# Altium PCB ART-Pi_STM32H750_COPY.PcbDoc (part 1 of 2)
Units mil, origin at the board's own origin, x right, y up, seen from the top; angles counter-clockwise.
Board outline 3346.46 x 2204.72 mil, 4 copper layers (Top Layer, VCC, GND, Bottom Layer), stack 30.634 mil thick; 187 components, 307 nets, 1023 pads, 107 vias.
Unrouted connection lines stored in the file: 478.
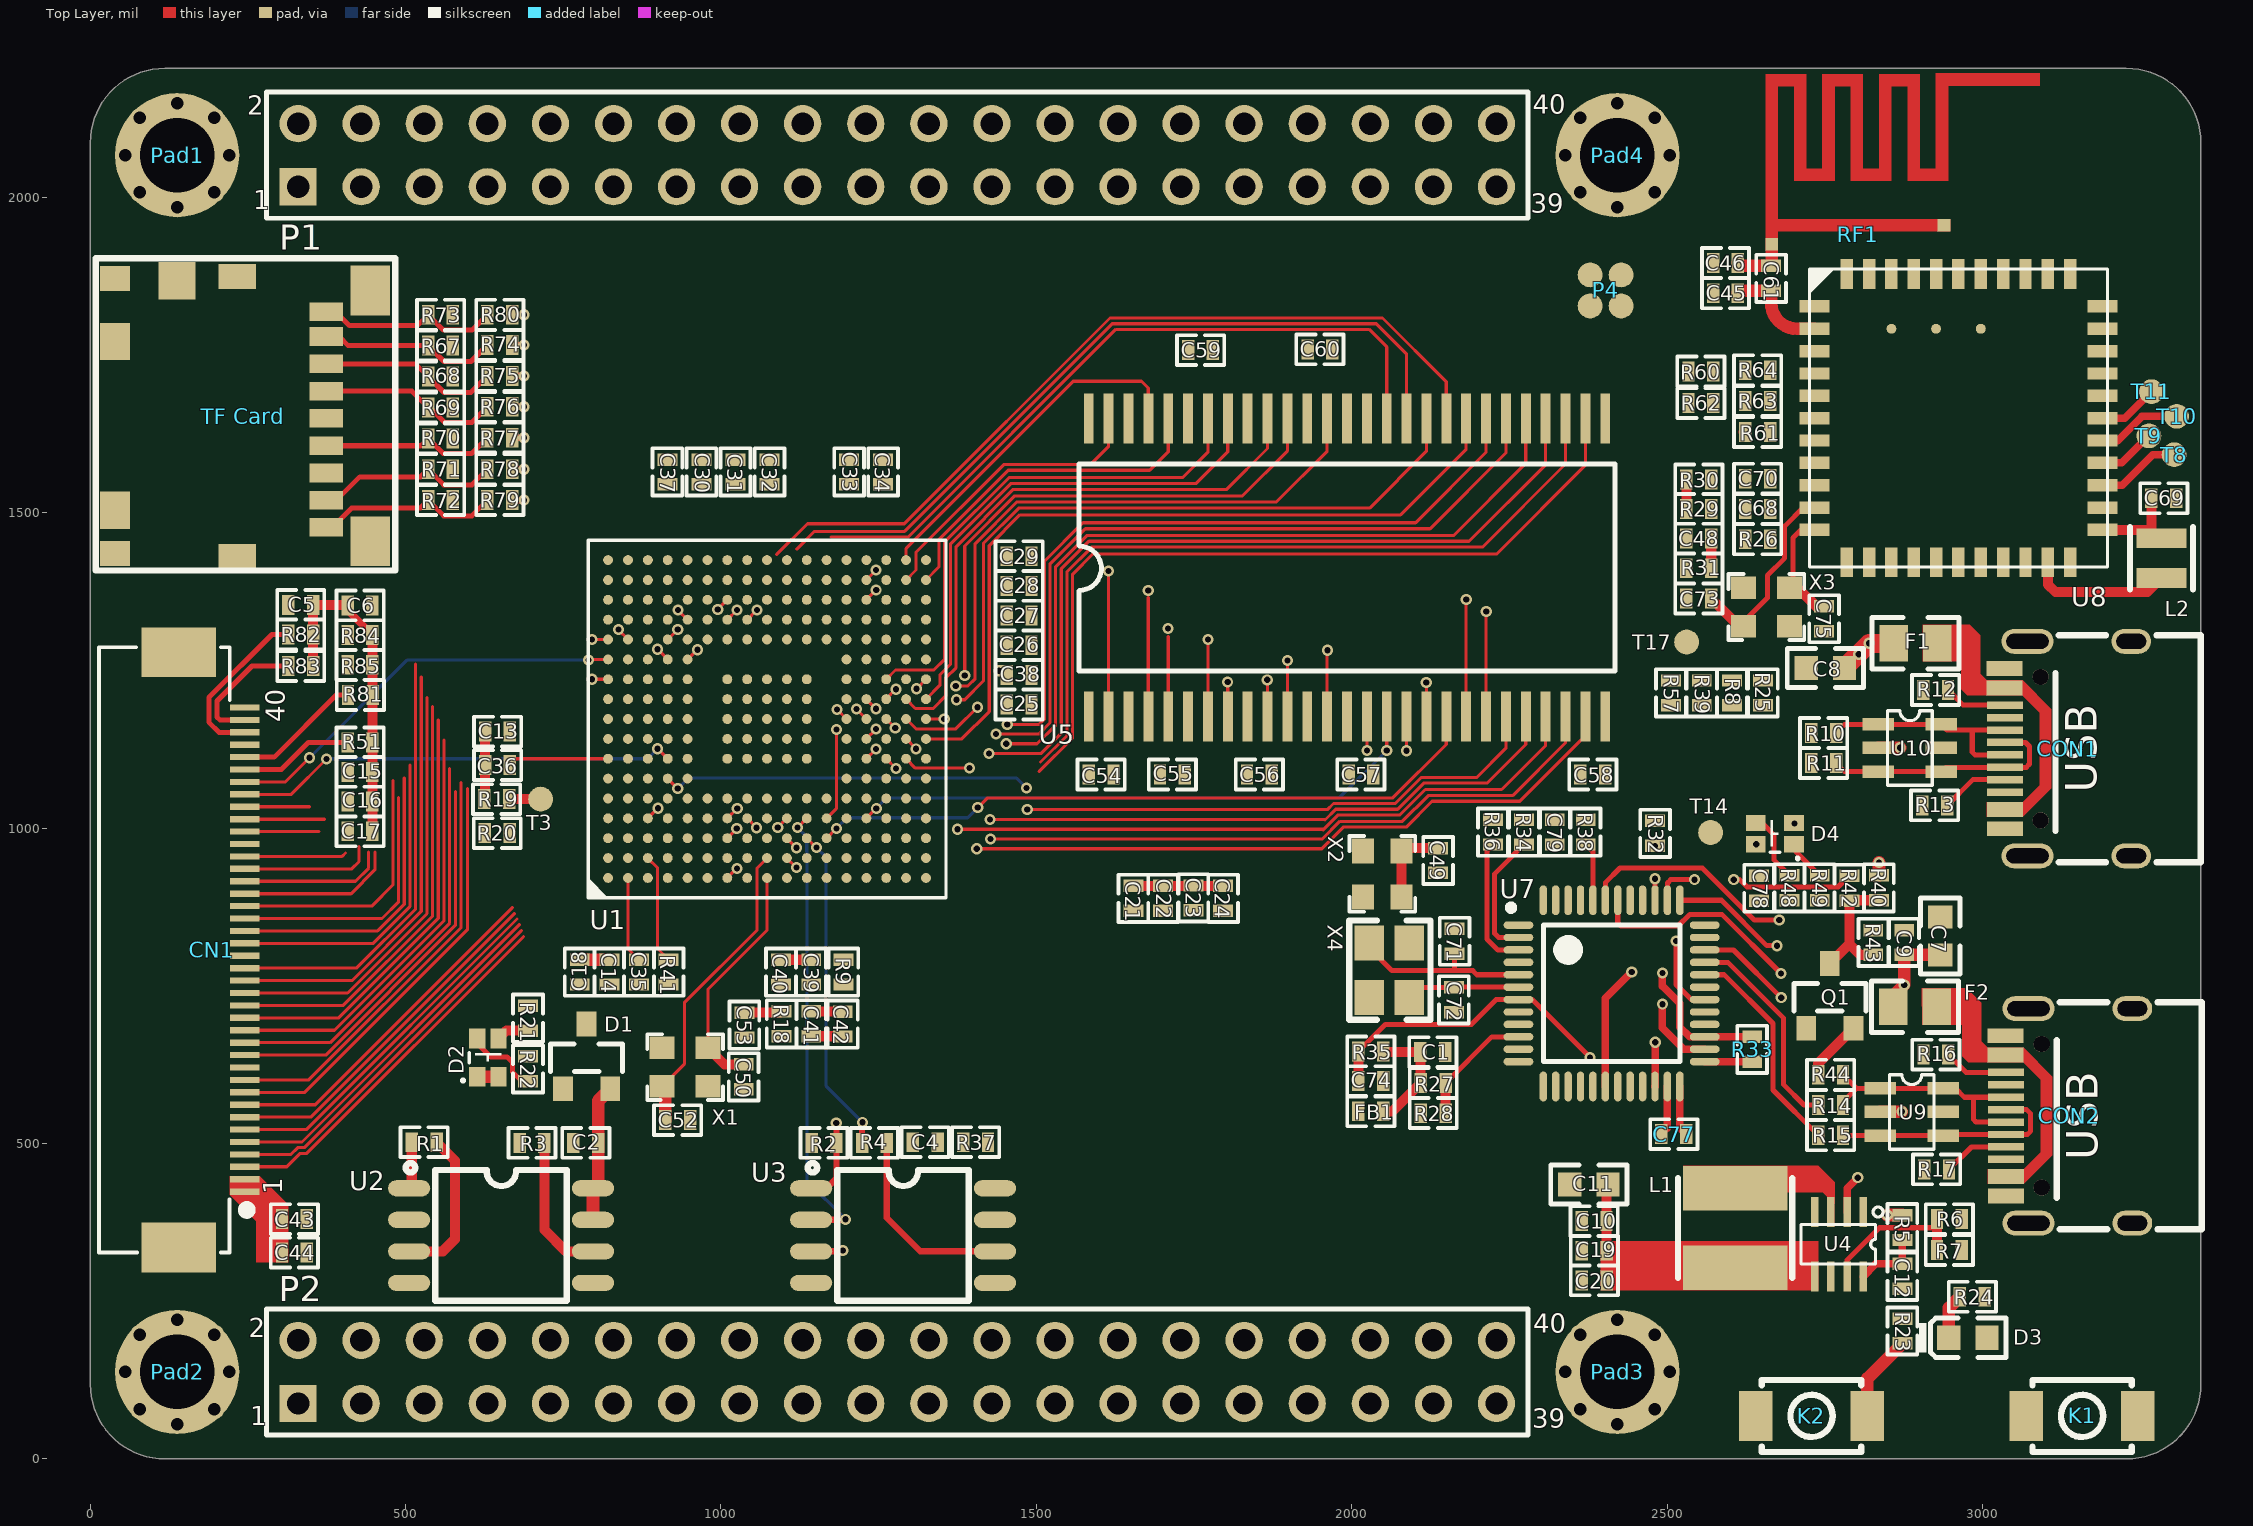
[diagram p0: Top Layer view]
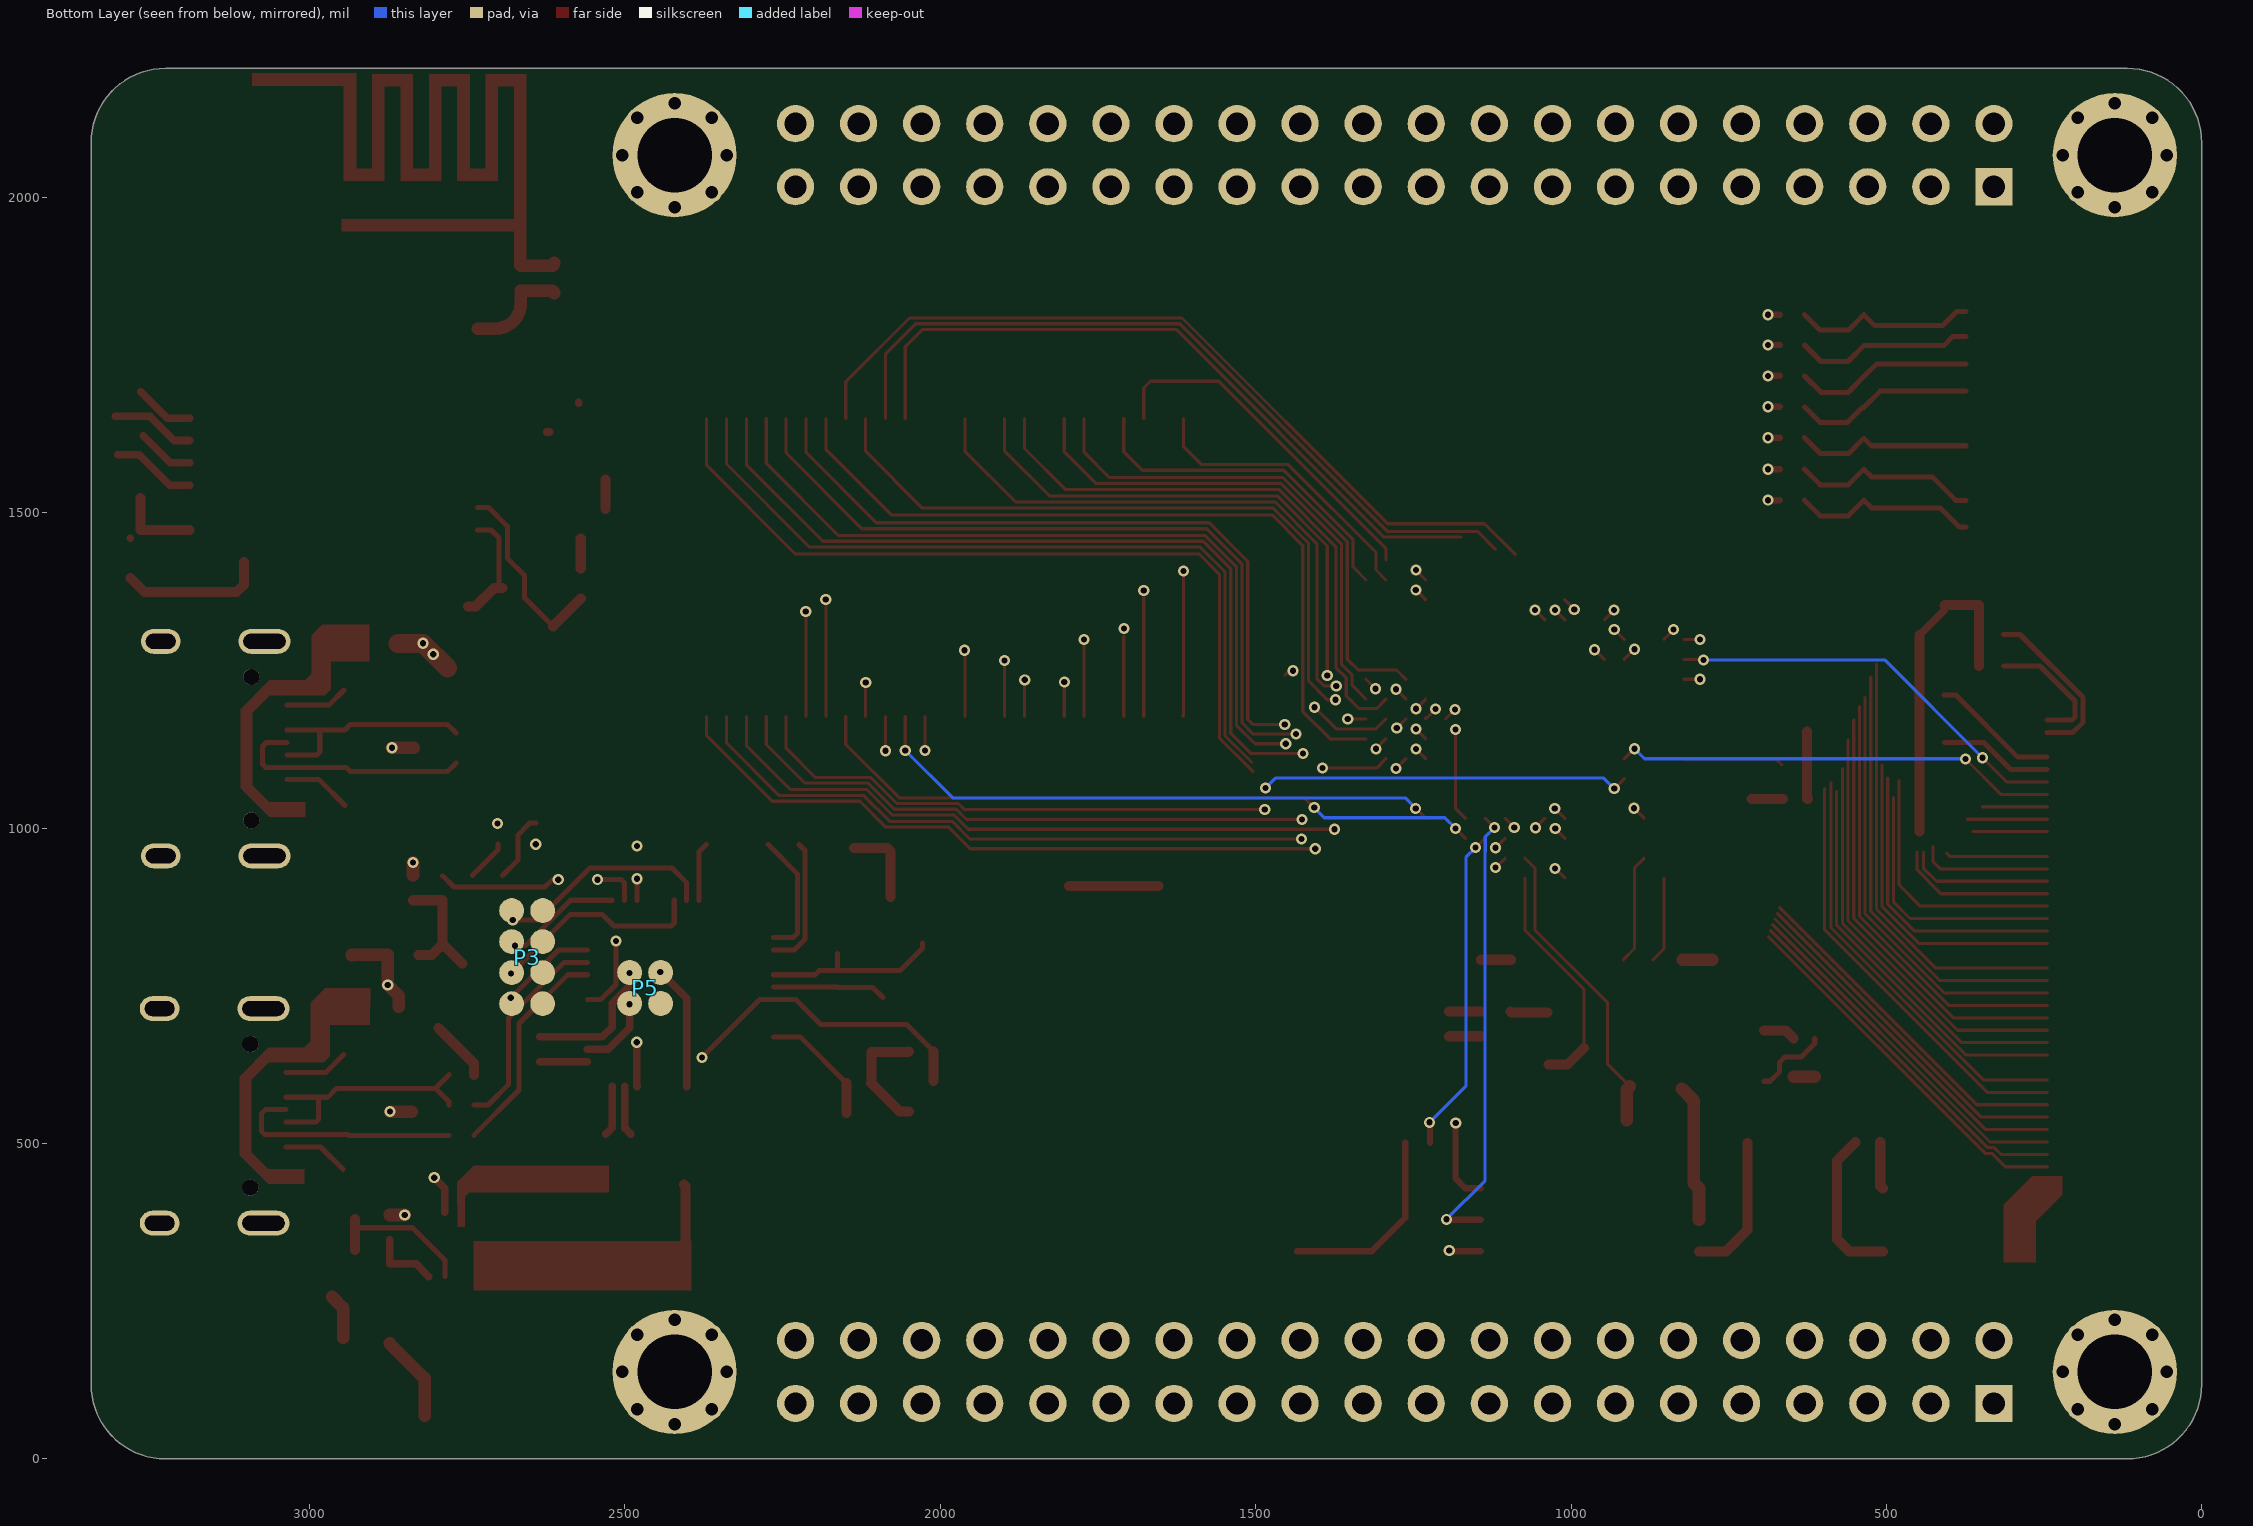
[diagram p1: Bottom Layer view, seen from below]
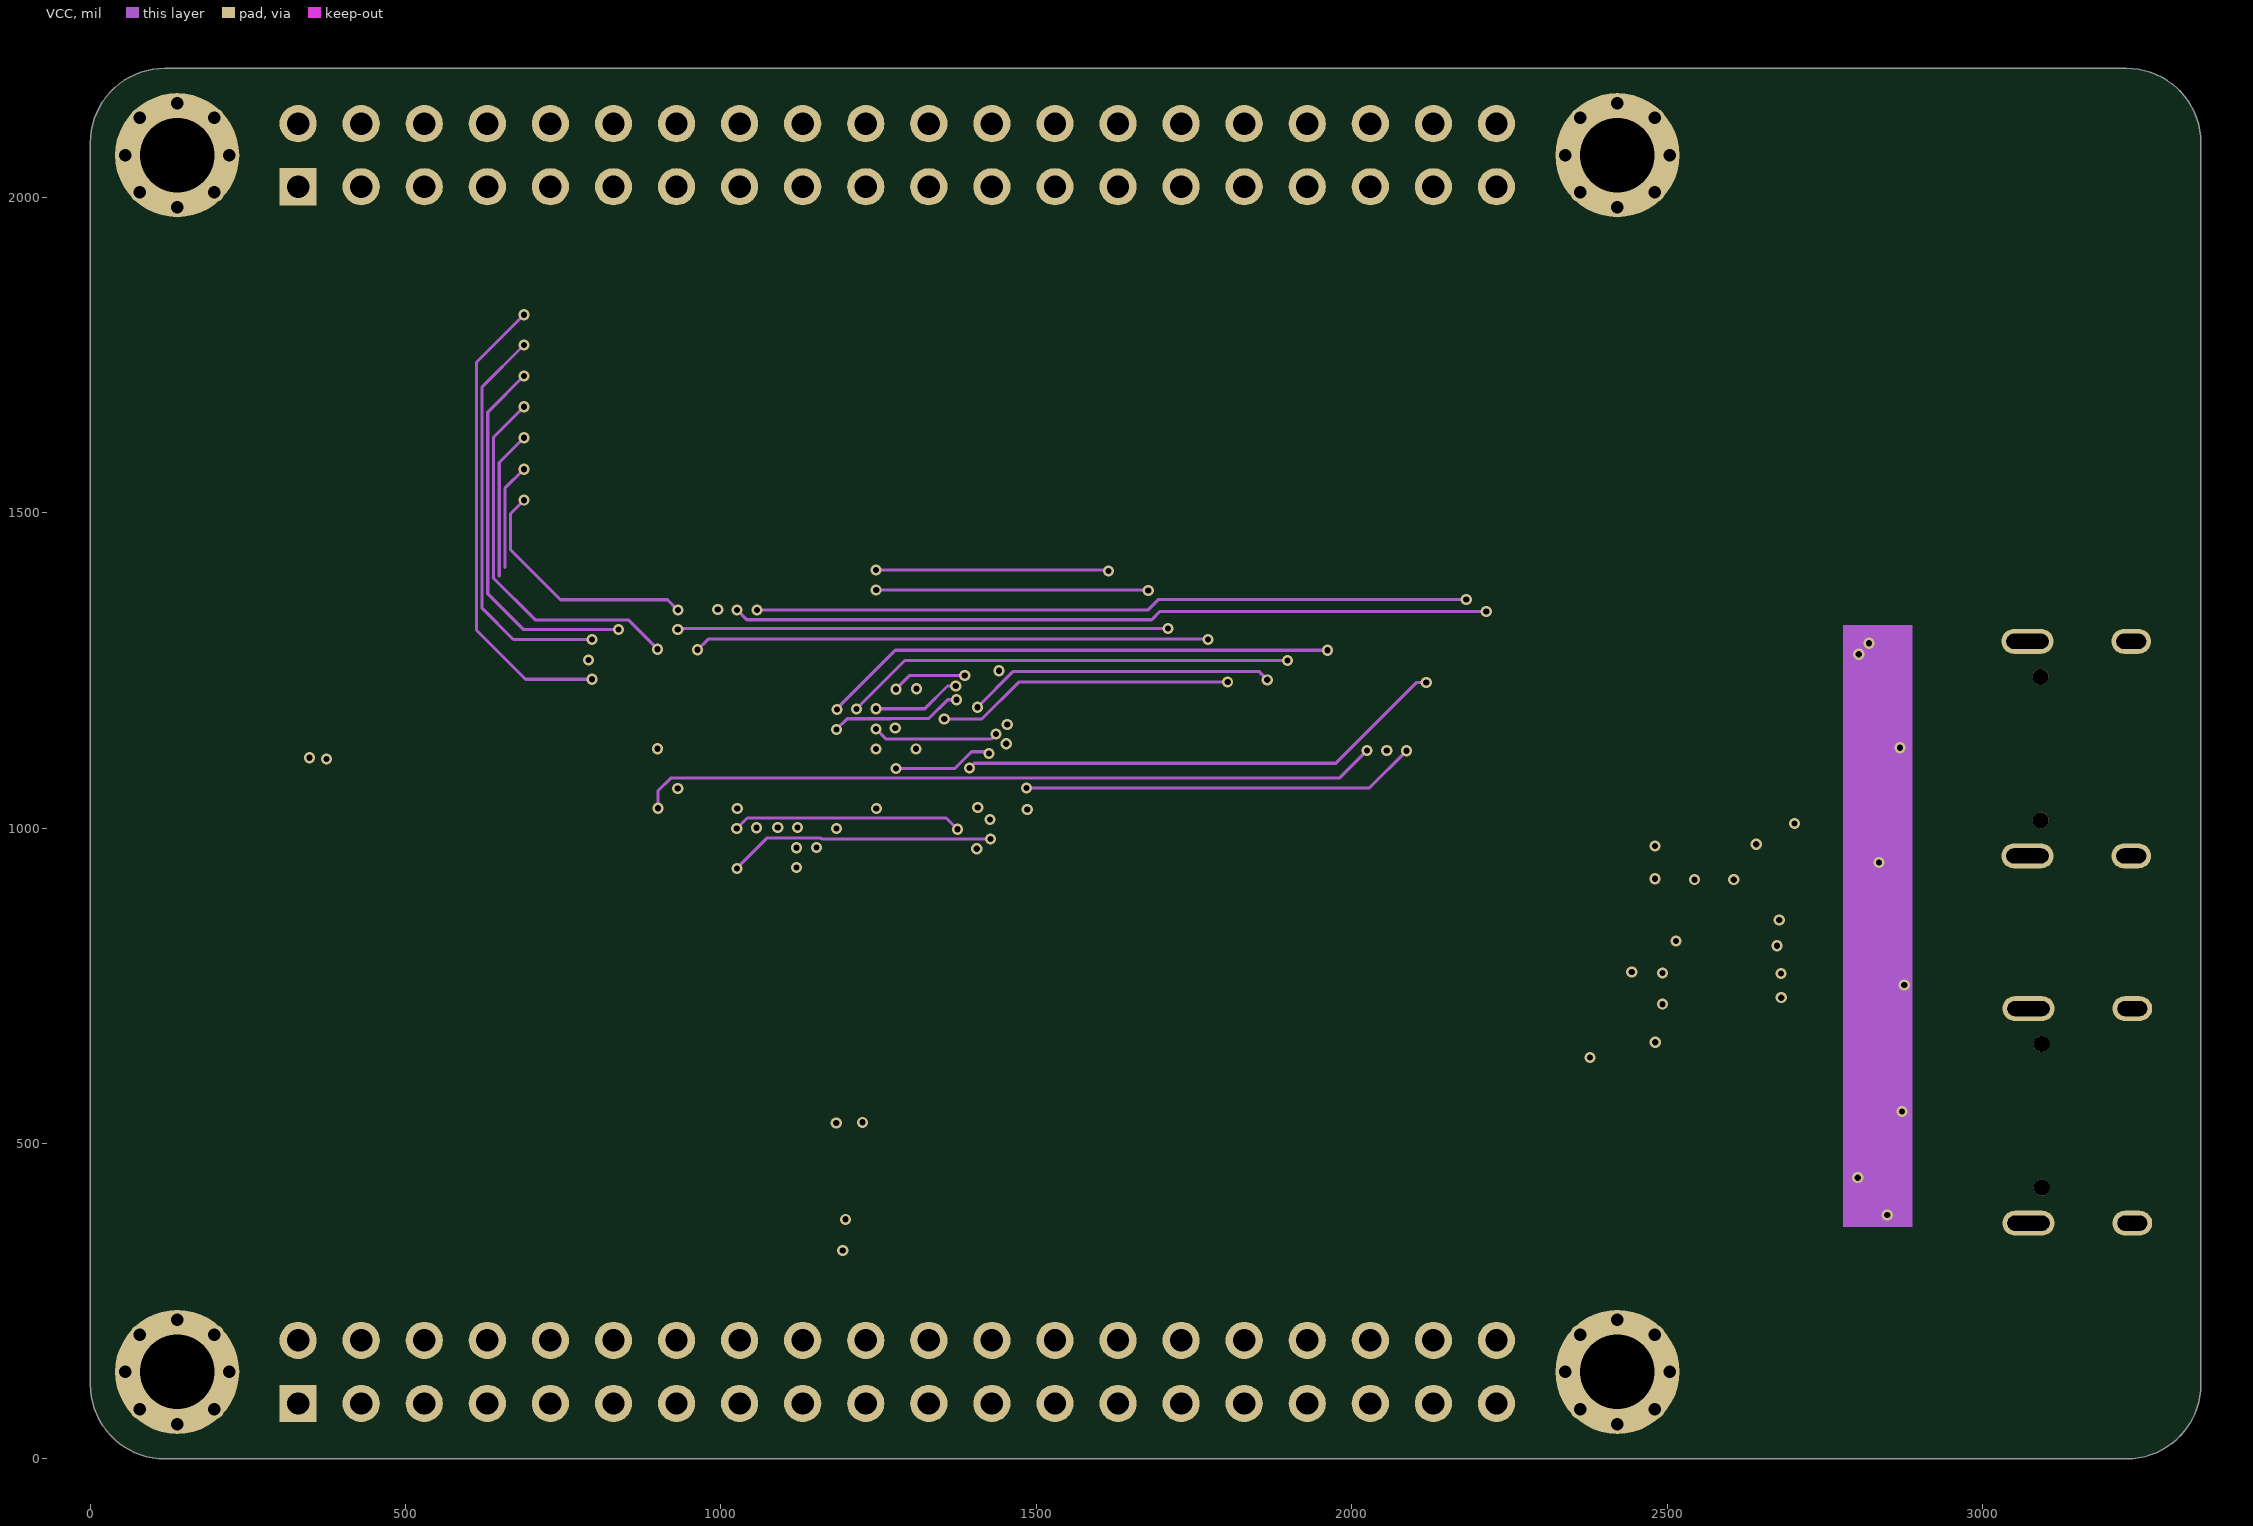
[diagram p2: VCC]
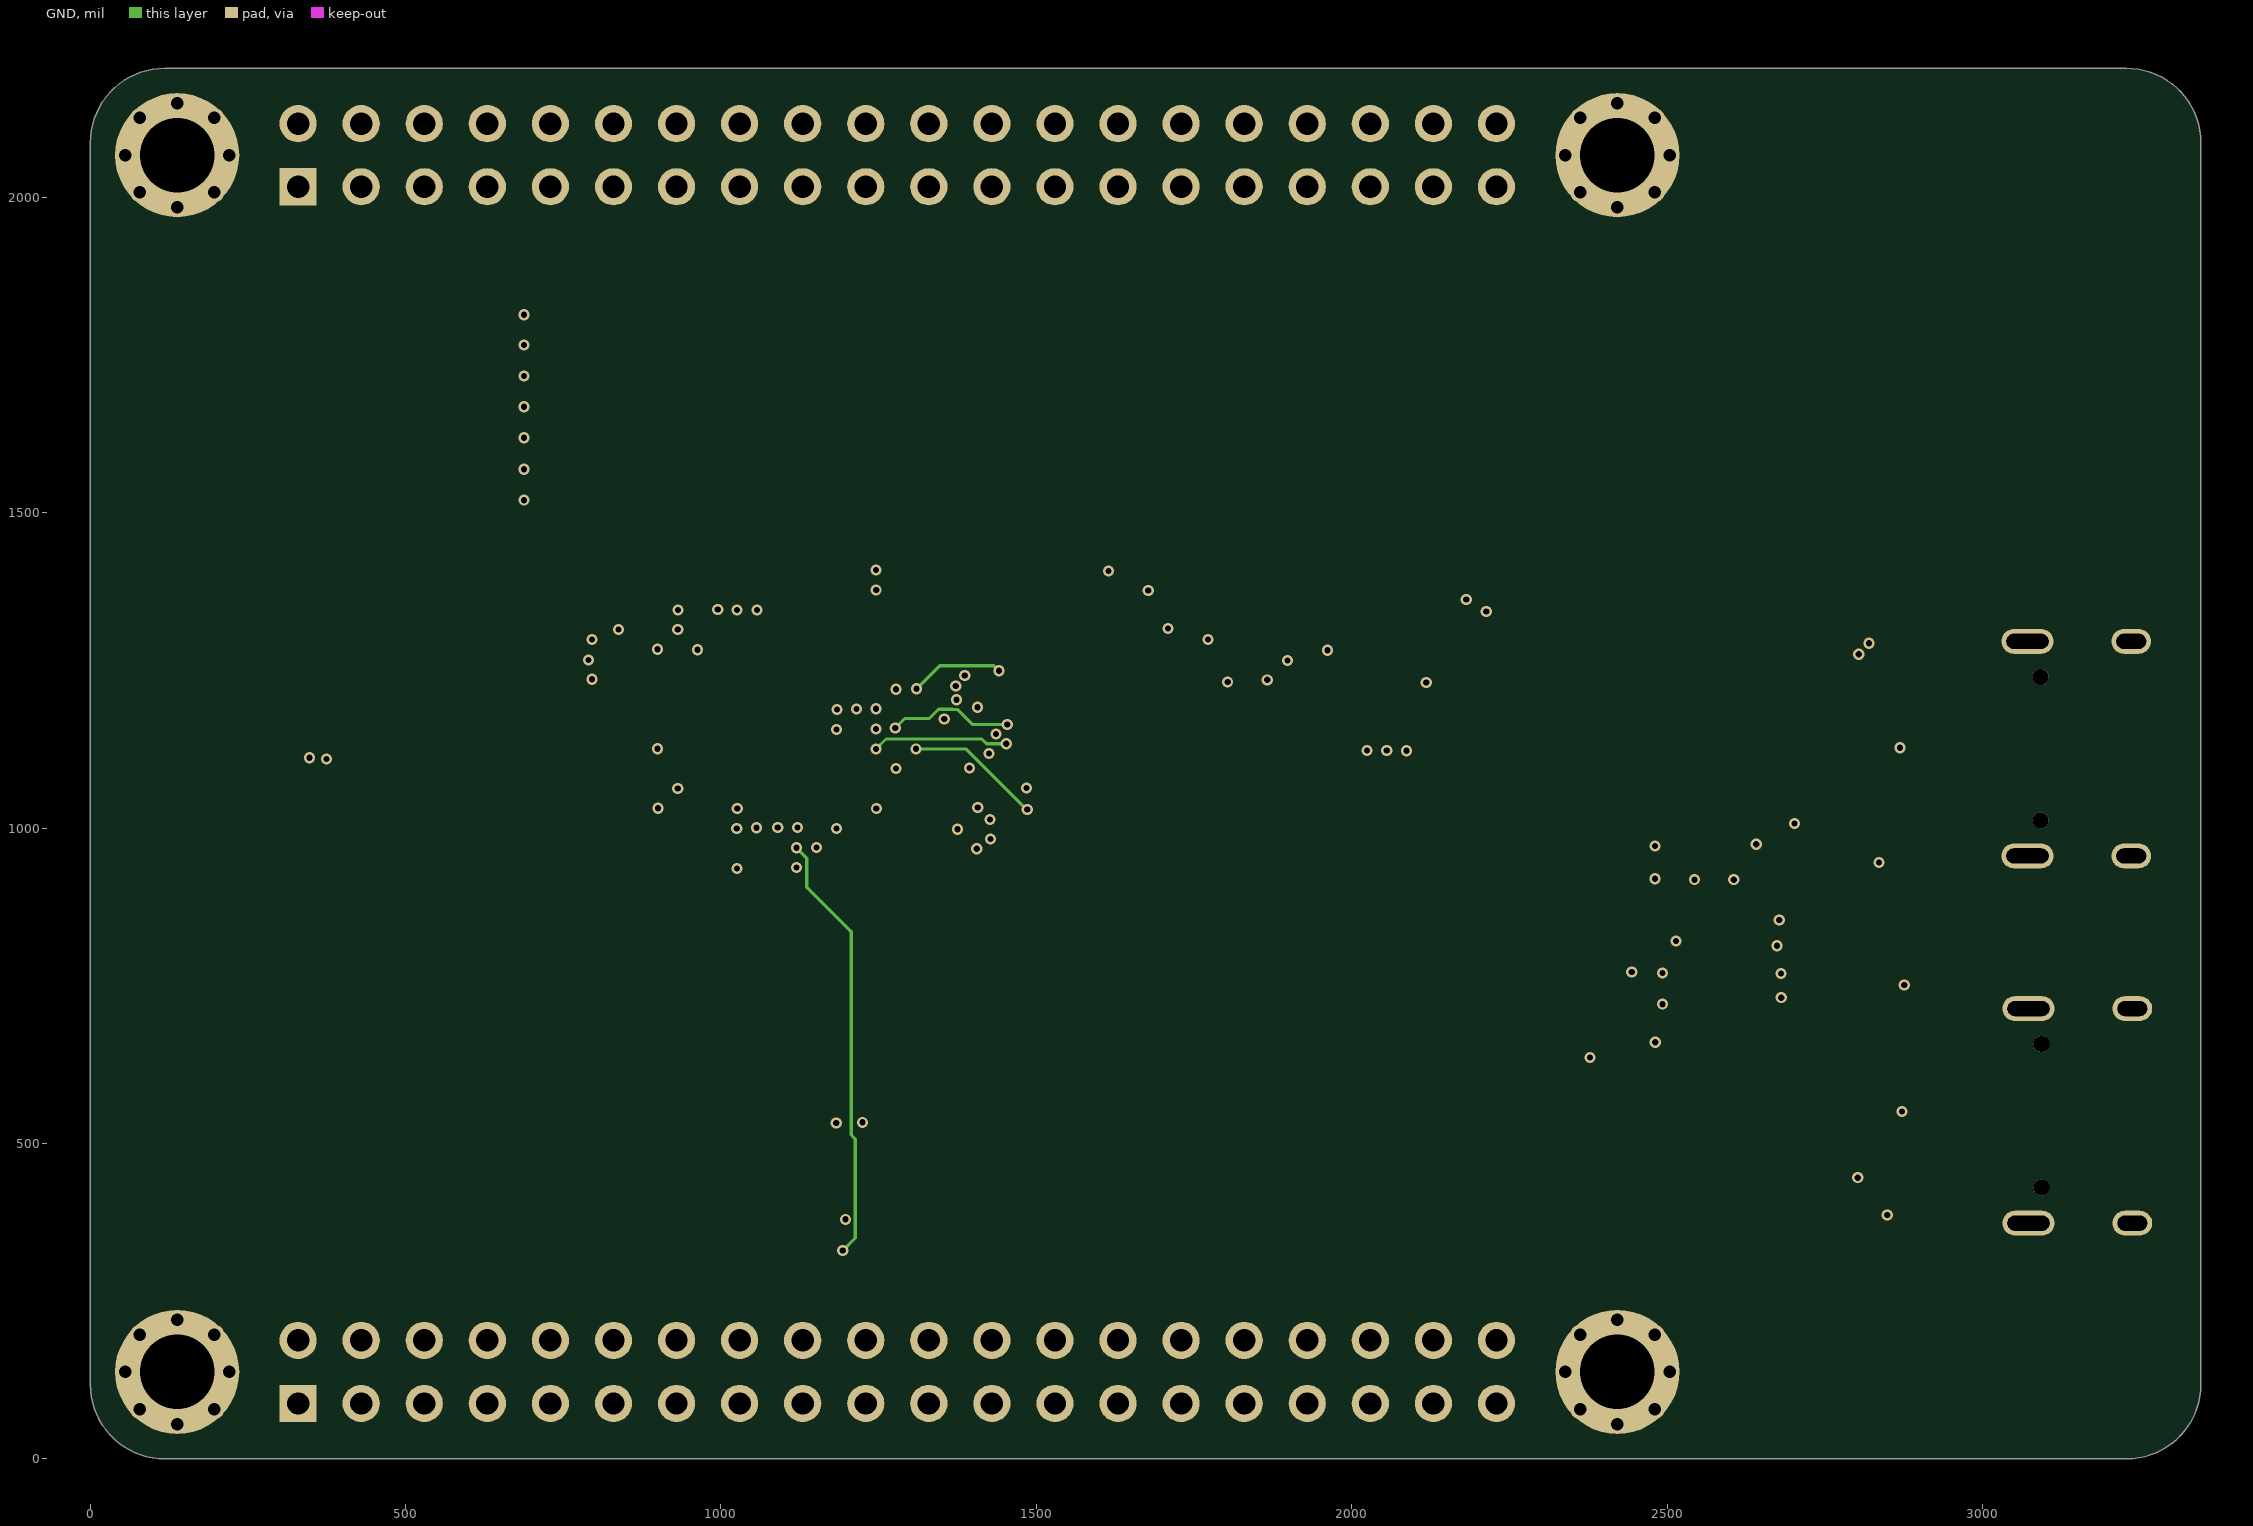
[diagram p3: GND]

## Layer stack, top to bottom
Top Solder: solder mask 0.4, Solder Resist, Dk 3.5
Top Layer: signal copper 1.4
Dielectric 1: core 10, FR-4, Dk 4.2
VCC: signal copper 1.417
Dielectric 3: prepreg 5, Dk 4.2
GND: signal copper 1.417
Dielectric 2: core 10, Dk 4.2
Bottom Layer: signal copper 1.4
Bottom Solder: solder mask 0.4, Solder Resist, Dk 3.5

## Board outline
0,118.11 0,2086.61 cw(c118.11,2086.61) 118.11,2204.72 3228.35,2204.72 cw(c3228.35,2086.61) 3346.46,2086.61 3346.46,118.11 cw(c3228.35,118.11) 3228.35,0 118.11,0 cw(c118.11,118.11)

## Design rules (kind name [scope] priority, off if disabled: settings)
Clearance [All] p1: gap=4 ignorepadtopadclearanceinfootprint=FALSE
DiffPairsRouting [All] p1: maxlimit=10 minlimit=10 mostfreqgap=10 toplayer_minwidth=4 toplayer_maxwidth=15 toplayer_prefwidth=15 midlayer1_minwidth=4 midlayer1_maxwidth=15 midlayer1_prefwidth=15 midlayer2_minwidth=4 midlayer2_maxwidth=15 midlayer2_prefwidth=15 bottomlayer_minwidth=4 bottomlayer_maxwidth=15 bottomlayer_prefwidth=15 maxuncoupledlength=500
PolygonConnect [All] p1: connectstyle=Direct reliefconductorwidth=16 reliefentries=4 polygonreliefangle="45 Angle" airgapwidth=16
RoomDefinition ART-Pi_SDRAM [InComponentClass('ART-Pi_SDRAM')] p1: confinementstyle=ConfineIn formatcopy=TRUE lockcomponents=FALSE outline -2110,-2540 -110,-2540 -110,-1540 -2110,-1540
RoomDefinition ART-Pi_Power [InComponentClass('ART-Pi_Power')] p2: confinementstyle=ConfineIn formatcopy=TRUE lockcomponents=FALSE outline -2110,-2540 -110,-2540 -110,-1540 -2110,-1540
RoomDefinition ART-Pi_Memory [InComponentClass('ART-Pi_Memory')] p3: confinementstyle=ConfineIn formatcopy=TRUE lockcomponents=FALSE outline -2110,-2540 -110,-2540 -110,-1540 -2110,-1540
RoomDefinition ART-Pi_LCD&Camera [InComponentClass('ART-Pi_LCD&Camera')] p4: confinementstyle=ConfineIn formatcopy=TRUE lockcomponents=FALSE outline -2110,-2540 -110,-2540 -110,-1540 -2110,-1540
RoomDefinition ART-Pi_H750_Peripherals [InComponentClass('ART-Pi_H750_Peripherals')] p5: confinementstyle=ConfineIn formatcopy=TRUE lockcomponents=FALSE outline -2110,-2540 -110,-2540 -110,-1540 -2110,-1540
RoomDefinition ART-Pi_F103_AP6212 [InComponentClass('ART-Pi_F103_AP6212')] p6: confinementstyle=ConfineIn formatcopy=TRUE lockcomponents=FALSE outline -2110,-2540 -110,-2540 -110,-1540 -2110,-1540
RoomDefinition ART-Pi_Connector [InComponentClass('ART-Pi_Connector')] p7: confinementstyle=ConfineIn formatcopy=TRUE lockcomponents=FALSE outline -2110,-2540 -110,-2540 -110,-1540 -2110,-1540
RoutingVias [All] p1: holewidth=9.84 width=19.68 viastyle="Through Hole" minholewidth=7.87 minwidth=17.72 maxholewidth=19.68 maxwidth=39.37
SolderMaskExpansion [All] p1: expansion=5
Width [All] p1: maxlimit=100 minlimit=4 preferedwidth=10
29 further rules are at their usual default settings.

## Classes and differential pairs
net class SD_DAT[0..3]: SD_DAT0 SD_DAT1 SD_DAT2 SD_DAT3
net class LCD_R[0..7]: LCD_R0 LCD_R1 LCD_R2 LCD_R3 LCD_R4 LCD_R5 LCD_R6 LCD_R7
net class LCD_G[0..7]: LCD_G0 LCD_G1 LCD_G2 LCD_G3 LCD_G4 LCD_G5 LCD_G6 LCD_G7
net class LCD_B[0..7]: LCD_B0 LCD_B1 LCD_B2 LCD_B3 LCD_B4 LCD_B5 LCD_B6 LCD_B7
net class FMC_D[0..15]: FMC_D0 FMC_D1 FMC_D2 FMC_D3 FMC_D4 FMC_D5 FMC_D6 FMC_D7 FMC_D8 FMC_D9 FMC_D10 FMC_D11 FMC_D12 FMC_D13 FMC_D14 FMC_D15
net class FMC_A[0..12]: FMC_A0 FMC_A1 FMC_A2 FMC_A3 FMC_A4 FMC_A5 FMC_A6 FMC_A7 FMC_A8 FMC_A9 FMC_A10 FMC_A11 FMC_A12
component class ART-Pi_SDRAM: C54 C55 C56 C57 C58 C59 C60 U5
component class ART-Pi_Power: C7 C8 C9 C10 C11 C12 C13 C14 C15 C16 C17 C18 C19 C20 C21 C22 C23 C24 C25 C26 C27 C28 C29 C30 C31 C32 C33 C34 C35 C36 C37 C38 C39 C40 C41 C42 D1 FB1 L1 R5 R6 R7 R9 U4
component class ART-Pi_Memory: C2 C4 C5 C6 R1 R2 R3 R4 R67 R68 R69 R70 R71 R72 R73 R74 R75 R76 R77 R78 R79 R80 "TF Card" U2 U3
component class ART-Pi_LCD&Camera: C43 C44 CN1 R51 R81 R82 R83
component class ART-Pi_H750_Peripherals: C49 C50 C52 C53 D2 D3 K1 K2 R18 R19 R20 R21 R22 R23 R24 R41 T3 X1 X2
component class ART-Pi_F103_AP6212: C1 C45 C46 C48 C61 C68 C69 C70 C71 C72 C73 C74 C75 C77 C78 C79 CON2 D4 F2 L2 P3 P4 P5 Q1 R8 R14 R15 R16 R17 R25 R26 R27 R28 R29 R30 R31 R32 R33 R34 R35 R36 R38 R39 R40 R42 R43 R44 R48 R49 R57 R60 R61 R62 R63 R64 RF1 T8 T9 T10 T11 T14 T17 U7 U8 U9 X3 X4
component class ART-Pi_Connector: CON1 F1 P1 P2 Pad1 Pad2 Pad3 Pad4 R10 R11 R12 R13 R37 R84 R85 U10
differential pair F103_USB: +F103_USB_P -F103_USB_N
differential pair USB_OTG_FS1: +USB_OTG_FS1_P -USB_OTG_FS1_N

## Components (designator, comment, footprint, x,y, rotation, side; value= is the part's Value field where it differs from the comment)
C1 "100nF" 0402_C 2148.37,645 r180 top
C2 "100nF" 0402_C 766,501 r0 top
C4 "100nF" 0402_C 1304,502 r0 top
C5 "4.7uF" 0402_C 314,1354 r0 top
C6 "100nF" 0402_C 447.37,1353 r180 top
C7 "22uF" 0603_C 2933,829 r270 top
C8 "22uF" 0603_C 2751,1254 r0 top
C9 "100nF" 0402_C 2876,838.37 r270 top
C10 "100nF" 0402_C 2364.63,377 r0 top
C11 "22uF" 0603_C 2376,435 r0 top
C12 "100nF" 0402_C 2873,309 r270 top
C13 "4.7uF" 0402_C 626,1153 r0 top
C14 "100nF" 0402_C 823,752 r90 top
C15 "100nF" 0402_C 408,1089 r0 top
C16 "100nF" 0402_C 408,1042 r0 top
C17 "100nF" 0402_C 408,995 r0 top
C18 "100nF" 0402_C 776,752 r90 top
C19 "100nF" 0402_C 2365,330 r0 top
C20 "100nF" 0402_C 2365,283 r0 top
C21 "100nF" 0402_C 1654,869 r90 top
C22 "100nF" 0402_C 1701,869 r90 top
C23 "100nF" 0402_C 1749,869.63 r90 top
C24 "100nF" 0402_C 1796,869 r90 top
C25 "100nF" 0402_C 1492.37,1196 r180 top
C26 "100nF" 0402_C 1492.37,1290 r180 top
C27 "100nF" 0402_C 1492.37,1337 r180 top
C28 "100nF" 0402_C 1492.37,1384 r180 top
C29 "100nF" 0402_C 1492.37,1431 r180 top
C30 "100nF" 0402_C 969,1584.37 r270 top
C31 "100nF" 0402_C 1023,1584.37 r270 top
C32 "100nF" 0402_C 1077,1584.37 r270 top
C33 "100nF" 0402_C 1203,1584.37 r270 top
C34 "100nF" 0402_C 1257,1584.37 r270 top
C35 "100nF" 0402_C 870,752 r90 top
C36 "2.2uF" 0402_C 626,1100 r0 top
C37 "2.2uF" 0402_C 915,1584.37 r270 top
C38 "2.2uF" 0402_C 1492.37,1243 r180 top
C39 "1uF" 0402_C 1143,752 r90 top
C40 "100nF" 0402_C 1095,752 r90 top
C41 "1uF" 0402_C 1143,670 r90 top
C42 "100nF" 0402_C 1193,669.63 r90 top
C43 "4.7uF" 0402_C 343.37,380 r180 top
C44 "100nF" 0402_C 343.37,327 r180 top
C45 "DNP" 0402_C 2612.37,1848 r180 top
C46 "DNP" 0402_C 2612.37,1896 r180 top
C48 "100nF" 0402_C 2570,1459 r180 top
C49 "100nF" 0402_C 2137,929 r90 top
C50 "22pF" 0402_C 1036,625.37 r270 top
C52 "22pF" 0402_C 951,537 r180 top
C53 "100nF" 0402_C 1037,668 r90 top
C54 "100nF" 0402_C 1622.37,1085 r180 top
C55 "100nF" 0402_C 1735.37,1085 r180 top
C56 "100nF" 0402_C 1873.37,1085 r180 top
C57 "100nF" 0402_C 2034.37,1085 r180 top
C58 "100nF" 0402_C 2362.63,1085 r0 top
C59 "100nF" 0402_C 1780,1758 r180 top
C60 "100nF" 0402_C 1969.37,1759 r180 top
C61 "10nF" 0402_C 2665,1891.37 r270 top
C68 "4.7uF" 0402_C 2663.37,1506 r180 top
C69 "10uF" 0402_C 3268,1523 r0 top
C70 "100nF" 0402_C 2663.37,1554 r180 top
C71 "100nF" 0402_C 2163,840.37 r270 top
C72 "100nF" 0402_C 2162,708 r90 top
C73 "12pF" 0402_C 2570,1364 r180 top
C74 "100nF" 0402_C 2050,599 r180 top
C75 "12pF" 0402_C 2749,1351.57 r270 top
C77 "100nF" 0402_C 2491,515 r0 top
C78 "100nF" 0402_C 2646,885 r90 top
C79 "100nF" 0402_C 2322,1013.37 r270 top
CN1 "RGB888" FPC-TOP40 249,423.61 r90 top locked
CON1 "USB type C 2.0" USB_C 3236,1126 r90 top locked
CON2 "USB type C 2.0" USB_C 3237.69,543.79 r90 top locked
D1 "BAV70 A4" SOT23_P 787,638 r0 top
D2 "LED2" LED2-0603 626,636 r90 top
D3 "LED" 0603_LED 2977,192 r0 top
D4 "LED2" LED2-0603 2671,987 r180 top
F1 "Fuse 1A" 0805_R 2894,1293 r180 top
F2 "Fuse 1A" 0805_R 2893,717 r180 top
FB1 "Inductor Iron" 0402_R 2050,551 r180 top value="600Ω ±25% 100MHz"
K1 "RESET" SW-SMD 3158,68 r180 top
K2 "USER_KEY" SW-SMD 2729,68 r180 top
L1 "SPH4012H1R0MT,1uH" SPH4012H1R0MT 2608,366 r270 top value=10mH
L2 "VLS252012-4R7M" FNR252012S 3284,1428 r90 top value=10mH
P1 "Header 20X2" HDR2X20 329.53,2016.93 r0 top locked
P2 "Header 20X2" HDR2X20 329.53,87.8 r0 top locked
P3 "Header 4X2" Test_Point_8 2679.6,721.69 r90 bottom
P4 "Header 2X2" Test_Point_4 2377.99,1827.9 r90 top
P5 "Header 2X2" Test_Point_4 2492.6,721.9 r90 bottom
Pad1 "Socket" Pad-3mm 137.8,2066.93 r0 top locked
Pad2 "Socket" Pad-3mm 137.8,137.8 r0 top locked
Pad3 "Socket" Pad-3mm 2421.26,137.8 r0 top locked
Pad4 "Socket" Pad-3mm 2421.26,2066.93 r0 top locked
Q1 "S8050 Y1" SOT23_P 2758,734 r0 top
R1 "10K" 0402_R 549,502 r180 top
R2 "10KΩ" 0402_R 1143.63,501 r0 top
R3 "22Ω±1%" 0402_R 720,501 r180 top
R4 "22Ω±1%" 0402_R 1263,501 r180 top
R5 "10KΩ" 0402_R 2873,347 r90 top
R6 "200KΩ ±1%" 0402_R 2928,380 r0 top
R7 "44.2KΩ ±1%" 0402_R 2967.37,331 r180 top
R8 "47KΩ" 0402_R 2603,1234 r270 top
R9 "0Ω" 0402_R 1194,791.37 r270 top
R10 "22Ω±1%" 0402_R 2768,1151 r180 top
R11 "22Ω±1%" 0402_R 2768,1103 r180 top
R12 "5.1KΩ" 0402_R 2945.37,1219 r180 top
R13 "5.1KΩ" 0402_R 2944,1036 r180 top
R14 "22Ω±1%" 0402_R 2779,561 r180 top
R15 "22Ω±1%" 0402_R 2779,513 r180 top
R16 "5.1KΩ" 0402_R 2946,641 r180 top
R17 "5.1KΩ" 0402_R 2947,459 r180 top
R18 "10KΩ" 0402_R 1096,670 r90 top
R19 "10KΩ" 0402_R 624.63,1046 r0 top
R20 "10KΩ" 0402_R 625.63,992 r0 top
R21 "2KΩ" 0402_R 694,679 r90 top
R22 "2KΩ" 0402_R 694,598.63 r90 top
R23 "10KΩ" 0402_R 2873,183 r90 top
R24 "2KΩ" 0402_R 2964.33,257 r0 top
R25 "47KΩ" 0402_R 2652,1234 r270 top
R26 "47KΩ" 0402_R 2624,1458 r0 top
R27 "4.7KΩ" 0402_R 2149,596 r180 top
R28 "4.7KΩ" 0402_R 2149,548 r180 top
R29 "47KΩ" 0402_R 2530.63,1506 r0 top
R30 "47KΩ" 0402_R 2530.63,1553 r0 top
R31 "0Ω" 0402_R 2570,1412 r180 top
R32 "4.7KΩ" 0402_R 2481,1011.37 r270 top
R33 "100Ω" 0402_R 2635,629.63 r90 top
R34 "10KΩ" 0402_R 2273,974 r90 top
R35 "10KΩ" 0402_R 2010.63,646 r0 top
R36 "10KΩ[DNP]" 0402_R 2224,974 r90 top
R37 "10KΩ" 0402_R 1384,502 r0 top
R38 "10KΩ" 0402_R 2371,974 r90 top
R39 "22Ω±1%" 0402_R 2555,1234 r270 top
R40 "10KΩ" 0402_R 2836,925 r270 top
R41 "1KΩ" 0402_R 917,752 r90 top
R42 "100Ω" 0402_R 2789,885 r90 top
R43 "36KΩ" 0402_R 2827,799 r90 top
R44 "1.5KΩ" 0402_R 2779,609 r180 top
R48 "2KΩ" 0402_R 2694,885.63 r90 top
R49 "2KΩ" 0402_R 2742,925 r270 top
R51 "10KΩ" 0402_R 447.37,1136 r180 top
R57 "1KΩ" 0402_R 2506,1234 r270 top
R60 "10KΩ" 0402_R 2534,1724 r0 top
R61 "10KΩ" 0402_R 2624,1628 r0 top
R62 "10KΩ" 0402_R 2573.37,1674 r180 top
R63 "10KΩ" 0402_R 2624,1677 r0 top
R64 "10KΩ" 0402_R 2624,1726 r0 top
R67 "47KΩ" 0402_R 575,1765 r180 top
R68 "47KΩ" 0402_R 575,1716 r180 top
R69 "47KΩ" 0402_R 575,1667 r180 top
R70 "47KΩ" 0402_R 575,1618 r180 top
R71 "47KΩ" 0402_R 575,1569 r180 top
R72 "47KΩ" 0402_R 575,1520 r180 top
R73 "47KΩ" 0402_R 575,1814 r180 top
R74 "22Ω±1%" 0402_R 629.63,1766 r0 top
R75 "22Ω±1%" 0402_R 629.63,1717 r0 top
R76 "22Ω±1%" 0402_R 629.63,1668 r0 top
R77 "22Ω±1%" 0402_R 629.63,1619 r0 top
R78 "22Ω±1%" 0402_R 629.63,1569 r0 top
R79 "22Ω±1%" 0402_R 629.63,1520 r0 top
R80 "22Ω±1%" 0402_R 629.63,1814 r0 top
R81 "10KΩ" 0402_R 448,1211 r180 top
R82 "10KΩ" 0402_R 353.37,1307 r180 top
R83 "10KΩ" 0402_R 353.37,1257 r180 top
R84 "4.7KΩ" 0402_R 447.37,1306 r180 top
R85 "4.7KΩ" 0402_R 447.37,1259 r180 top
RF1 "ANT" RF 2666,1926 r0 top
T3 "TEST POINT" Test_Point 714,1046 r0 top
T8 "TEST POINT" Test_Point 3304,1592 r0 top
T9 "TEST POINT" Test_Point 3264,1622 r0 top
T10 "TEST POINT" Test_Point 3308,1653 r90 top
T11 "TEST POINT" Test_Point 3268,1692 r90 top
T14 "TEST POINT" Test_Point 2569,993 r90 top
T17 "TEST POINT" Test_Point 2531,1295 r90 top
"TF Card" "microSD" TF-SMD_TF-110 246,1656 r90 top locked
U1 "STM32H750XB" TFBGA240+25 1073.01,1172.99 r90 top
U2 "QSPI_FLASH" SOIC_8 651.33,357.22 r0 top
U3 "QSPI_FLASH" SOIC_8 1288.67,357.22 r0 top
U4 "MP2144GJ" TSOP23-8 2811,391.36 r270 top
U5 "W9825G6KH" TSOP54 1583.1,1177.06 r90 top
U7 "STM32F103CBT6" LQFP48_N 2412,738 r0 top
U8 "AP6212/AP6212A" AP6212A 2962,1650 r0 top
U9 "BST236A054U" SOT23_6 2888,550 r90 top
U10 "BST236A054U" SOT23_6 2885,1127 r90 top
X1 "25Mhz" SMD2520 943,621 r0 top
X2 "32.768khz_osc" SMD2520 2048.48,927.42 r90 top
X3 "8Mhz/12pF" SMD2520 2657.59,1350.52 r0 top
X4 "8Mhz/12pF" XT-3225-4P 2028.01,818 r0 top

## Footprints (in the part's own frame and the unit in brackets; to place one, negate y for a bottom-side part, rotate by r counter-clockwise, add the part's x,y. Pads: shape width x height; smd on the part's side, far side on the other; paste and mask are expansions set on the pad)
0402_C [mm]
  rect 0.5x0.8 smd: 1(0,0) 2(1,0)
  silkscreen extent -0.45,-0.6 1.45,0.6, body extent 0.03,-0.25 1.03,0.25, height 0.49
0402_R [mm]
  rect 0.5x0.8 smd: 1(0,0) 2(1,0)
  silkscreen extent -0.45,-0.6 1.45,0.6, body extent 0.02,-0.28 1.01,0.23, height 0.38
0603_C [mm]
  rect 0.93x0.98 smd: 1(-0.77,0) 2(0.77,0)
  silkscreen extent -1.54,-0.79 1.53,0.79, body extent -0.76,-0.43 0.84,0.38, height 0.88
0603_LED [mm]
  rect 0.93x0.98 smd: 1(0.77,0) 2(-0.77,0)
  silkscreen extent -1.98,-0.79 1.54,0.79, body extent -0.8,-0.4 0.8,0.4, height 0.6
0805_R [mm]
  rect 1.16x1.47 smd: 1(-0.875,0) 2(0.875,0)
  silkscreen extent -1.75,-1.03 1.75,1.03, body extent -1,-0.62 1,0.63, height 0.49
AP6212A [mm]
  rect 1.2x0.5 smd: 1(-5.8,4.5) 2(-5.8,3.6) 3(-5.8,2.7) 4(-5.8,1.8) 5(-5.8,0.9) 6(-5.8,0) 7(-5.8,-0.9) 8(-5.8,-1.8) 9(-5.8,-2.7) 10(-5.8,-3.6) 11(-5.8,-4.5) 23(5.8,-4.5) 24(5.8,-3.6) 25(5.8,-2.7) 26(5.8,-1.8) 27(5.8,-0.9) 28(5.8,0) 29(5.8,0.9) 30(5.8,1.8) 31(5.8,2.7) 32(5.8,3.6) 33(5.8,4.5)
  rect 0.5x1.2 smd: 12(-4.5,-5.8) 13(-3.6,-5.8) 14(-2.7,-5.8) 15(-1.8,-5.8) 16(-0.9,-5.8) 17(0,-5.8) 18(0.9,-5.8) 19(1.8,-5.8) 20(2.7,-5.8) 21(3.6,-5.8) 22(4.5,-5.8) 34(4.5,5.8) 35(3.6,5.8) 36(2.7,5.8) 37(1.8,5.8) 38(0.9,5.8) 39(0,5.8) 40(-0.9,5.8) 41(-1.8,5.8) 42(-2.7,5.8) 43(-3.6,5.8) 44(-4.5,5.8)
  round 0.4 smd: 45(-2.7,3.6) 46(-0.9,3.6) 47(0.9,3.6)
  silkscreen extent -6,-6 6,6, body extent -6.03,-6 5.97,6, height 1.52
FNR252012S [mm] "IND-SMD_L2.5-W2.0_FNR252012S"
  rect 0.8x2 smd: 1(-0.8,0) 2(0.8,0)
  silkscreen extent -1.25,-1.27 1.25,1.27, body extent -1.6,-1.25 1.7,1.25, height 2.2
FPC-TOP40 [mm]
  rect 0.25x1.2 smd: 1(0,0.102) 2(0.5,0.102) 3(1,0.102) 4(1.5,0.102) 5(2,0.102) 6(2.5,0.102) 7(3,0.102) 8(3.5,0.102) 9(4,0.102) 10(4.5,0.102) 11(5,0.102) 12(5.5,0.102) 13(6,0.102) 14(6.5,0.102) 15(7,0.102) 16(7.5,0.102) 17(8,0.102) 18(8.5,0.102) 19(9,0.102) 20(9.5,0.102) 21(10,0.102) 22(10.5,0.102) 23(11,0.102) 24(11.5,0.102) 25(12,0.102) 26(12.5,0.102) 27(13,0.102) 28(13.5,0.102) 29(14,0.102) 30(14.5,0.102) 31(15,0.102) 32(15.5,0.102) 33(16,0.102) 34(16.5,0.102) 35(17,0.102) 36(17.5,0.102) 37(18,0.102) 38(18.5,0.102) 39(19,0.102) 40(19.5,0.102)
  rect 2x3 smd: A(-2.25,2.754) B(21.725,2.754)
  silkscreen extent -2.45,-0.15 21.92,5.97, body extent -3.02,0.14 22.48,5.78, height 2.03
HDR2X20 [mm] "Connector; Header; 20x2 Position"
  rect 1.5x1.5 hole 0.9: 1(0,0)
  round 1.5 hole 0.9: 2(0,2.54) 3(2.54,0) 4(2.54,2.54) 5(5.08,0) 6(5.08,2.54) 7(7.62,0) 8(7.62,2.54) 9(10.16,0) 10(10.16,2.54) 11(12.7,0) 12(12.7,2.54) 13(15.24,0) 14(15.24,2.54) 15(17.78,0) 16(17.78,2.54) 17(20.32,0) 18(20.32,2.54) 19(22.86,0) 20(22.86,2.54) 21(25.4,0) 22(25.4,2.54) 23(27.94,0) 24(27.94,2.54) 25(30.48,0) 26(30.48,2.54) 27(33.02,0) 28(33.02,2.54) 29(35.56,0) 30(35.56,2.54) 31(38.1,0) 32(38.1,2.54) 33(40.64,0) 34(40.64,2.54) 35(43.18,0) 36(43.18,2.54) 37(45.72,0) 38(45.72,2.54) 39(48.26,0) 40(48.26,2.54)
  silkscreen extent -1.27,-1.27 49.53,3.81
LED2-0603 [mm] "LED-ARRAY-SMD_0603-4P-L1.6-W1.5-TL-RD"
  rect 0.8x0.65 smd: 1(-0.77,0.317) 2(0.77,0.317) 3(0.769,-0.533) 4(-0.77,-0.533)
  silkscreen extent -0.96,-0.65 0.19,0.93, body extent -0.81,-0.91 0.81,0.68, height 1.1
LQFP48_N [mm] "Thin QFP, 48-Leads, Body 7x7mm, Pitch 0.5mm, IPC Medium Density"
  oval 1.2x0.3 smd: 1(-3.75,2.75) 2(-3.75,2.25) 3(-3.75,1.75) 4(-3.75,1.25) 5(-3.75,0.75) 6(-3.75,0.25) 7(-3.75,-0.25) 8(-3.75,-0.75) 9(-3.75,-1.25) 10(-3.75,-1.75) 11(-3.75,-2.25) 12(-3.75,-2.75) 25(3.75,-2.75) 26(3.75,-2.25) 27(3.75,-1.75) 28(3.75,-1.25) 29(3.75,-0.75) 30(3.75,-0.25) 31(3.75,0.25) 32(3.75,0.75) 33(3.75,1.25) 34(3.75,1.75) 35(3.75,2.25) 36(3.75,2.75)
  oval 0.3x1.2 smd: 13(-2.75,-3.75) 14(-2.25,-3.75) 15(-1.75,-3.75) 16(-1.25,-3.75) 17(-0.75,-3.75) 18(-0.25,-3.75) 19(0.25,-3.75) 20(0.75,-3.75) 21(1.25,-3.75) 22(1.75,-3.75) 23(2.25,-3.75) 24(2.75,-3.75) 37(2.75,3.75) 38(2.25,3.75) 39(1.75,3.75) 40(1.25,3.75) 41(0.75,3.75) 42(0.25,3.75) 43(-0.25,3.75) 44(-0.75,3.75) 45(-1.25,3.75) 46(-1.75,3.75) 47(-2.25,3.75) 48(-2.75,3.75)
  silkscreen extent -4.17,-2.75 2.75,3.57, body extent -4.47,-4.5 4.53,4.5, height 1.46
Pad-3mm [mm] "Socket-3*5mm"
  round 0.8 hole 0.5: 0(-2.1,0) 0(-1.5,-1.5) 0(-1.5,1.5) 0(0,-2.1) 0(0,2.1) 0(1.5,-1.5) 0(1.5,1.5) 0(2.1,0)
  round 5 hole 3: 0(0,0)
RF [mil]
  rect 20x20 smd paste+0 mask+0: 0(273,30) 1(0,0)
  Top Layer region: 283,40 -10,40 -10,20 283,20
  Top Layer region: 425,271 260,271 260,251 425,251
  Top Layer region: -10,-10 10,-10 10,270 -10,270
  Top Layer region: -10,250 55,250 55,270 -10,270
  Top Layer region: 55,100 55,270 35,270 35,100
  Top Layer region: 35,100 100,100 100,120 35,120
  Top Layer region: 100,100 100,270 80,270 80,100
  Top Layer region: 190,100 190,270 170,270 170,100
  Top Layer region: 125,100 190,100 190,120 125,120
  Top Layer region: 145,100 145,270 125,270 125,100
  Top Layer region: 80,250 145,250 145,270 80,270
  Top Layer region: 280,100 280,270 260,270 260,100
  Top Layer region: 215,100 280,100 280,120 215,120
  Top Layer region: 235,100 235,270 215,270 215,100
  Top Layer region: 170,250 235,250 235,270 170,270
SMD2520 [mm]
  rect 1x0.9 smd: 1(-0.925,-0.775) 2(0.925,-0.775) 3(0.925,0.775) 4(-0.925,0.775)
  silkscreen extent -1.53,-1.33 1.53,1.33, body extent -1.55,-1.3 1.65,1.2, height 0.6
SOIC_8 [mm] "SOIC-8_L5.3-W5.3-P1.27-LS8.0-BL"
  oval 1.698x0.65 smd: 1(-3.7,1.823) 2(-3.7,0.553) 3(-3.7,-0.717) 4(-3.7,-1.987) 5(3.7,-1.987) 6(3.7,-0.717) 7(3.7,0.553) 8(3.7,1.823)
  silkscreen extent -3.84,-2.71 2.64,2.84, body extent -4.22,-2.79 4.17,2.59, height 2.29
SOT23_6 [mil]
  rect 20x50 smd: 1(37.5,50) 2(0.5,50) 3(-37.5,50) 4(-37.5,-50) 5(0.5,-50) 6(37.5,-50)
  silkscreen extent -59,-35 59,35, body extent -54,-45 56,51, height 43
SOT23_P [mil]
  rect 31.5x39.37 smd: 1(-37.4,-51.18) 2(37.4,-51.18) 3(0,51.18)
  silkscreen extent -57,-24 57,20, body extent -56,-57 58,53, height 47
SPH4012H1R0MT [mm] "IND-SMD_L4.0-W4.0"
  rect 1.8x4.2 smd: 1(-1.6,0) 2(1.6,0)
  silkscreen extent -2,-2.3 2,2.3, body extent -1.7,-1.5 1.75,1.5, height 2.1
SW-SMD [mm] "SW-SMD_L3.9-W2.9-P4.15-LS5.0"
  rect 1.35x2 smd: 1(-2.25,0) 2(2.25,0)
  silkscreen extent -2,-1.45 2,1.45, body extent -3,-1.85 3.1,1.85, height 2.5
Test_Point [mm]
  round 1 smd paste+0 mask+0: 1(0,0)
Test_Point_4 [mm]
  round 1 smd paste+0 mask+0: 1(0,0) 2(1.25,0) 3(1.25,-1.25) 4(0,-1.25)
Test_Point_8 [mm]
  round 1 smd paste+0 mask+0: 1(0,0) 2(1.25,0) 3(2.5,0) 4(3.75,0) 5(0,-1.25) 6(1.25,-1.25) 7(2.5,-1.25) 8(3.75,-1.25)
TF-SMD_TF-110 [mm]
  rect 0.75x1.35 smd: 1(3.136,-3.247) 2(2.036,-3.247) 3(0.936,-3.247) 4(-0.164,-3.247) 5(-1.264,-3.247) 6(-2.363,-3.247) 7(-3.464,-3.247) 8(-4.544,-3.247) 9(4.136,-3.247)
  rect 1.5x1.5 smd: 10(5.384,2.753)
  rect 1x1.2 smd: 11(5.474,5.253) 14(-5.601,5.253)
  rect 1.5x1.2 smd: 12(2.936,5.253) 13(-3.864,5.253)
  rect 1x1.5 smd: 15(-5.712,0.328) 18(5.549,0.328)
  rect 2x1.6 smd: 16(-5.114,-5.022) 17(4.987,-5.022)
  silkscreen extent -6.29,-6.03 6.29,6.03, body extent -6.82,-6.1 7.03,11.45, height 1.93
TFBGA240+25 [mm] "STM32H750XBH6"
  round 0.4 smd: A1(-6.4,6.4) A2(-5.6,6.4) A3(-4.8,6.4) A4(-4,6.4) A5(-3.2,6.4) A6(-2.4,6.4) A7(-1.6,6.4) A8(-0.8,6.4) A9(0,6.4) A10(0.8,6.4) A11(1.6,6.4) A12(2.4,6.4) A13(3.2,6.4) A14(4,6.4) A15(4.8,6.4) A16(5.6,6.4) A17(6.4,6.4) B1(-6.4,5.6) B2(-5.6,5.6) B3(-4.8,5.6) B4(-4,5.6) B5(-3.2,5.6) B6(-2.4,5.6) B7(-1.6,5.6) B8(-0.8,5.6) B9(0,5.6) B10(0.8,5.6) B11(1.6,5.6) B12(2.4,5.6) B13(3.2,5.6) B14(4,5.6) B15(4.8,5.6) B16(5.6,5.6) B17(6.4,5.6) C1(-6.4,4.8) C2(-5.6,4.8) C3(-4.8,4.8) C4(-4,4.8) C5(-3.2,4.8) C6(-2.4,4.8) C7(-1.6,4.8) C8(-0.8,4.8) C9(0,4.8) C10(0.8,4.8) C11(1.6,4.8) C12(2.4,4.8) C13(3.2,4.8) C14(4,4.8) C15(4.8,4.8) C16(5.6,4.8) C17(6.4,4.8) D1(-6.4,4) D2(-5.6,4) D3(-4.8,4) D4(-4,4) D5(-3.2,4) D6(-2.4,4) D7(-1.6,4) D8(-0.8,4) D9(0,4) D10(0.8,4) D11(1.6,4) D12(2.4,4) D13(3.2,4) D14(4,4) D15(4.8,4) D16(5.6,4) D17(6.4,4) E1(-6.4,3.2) E2(-5.6,3.2) E3(-4.8,3.2) E4(-4,3.2) E5(-3.2,3.2) E6(-2.4,3.2) E7(-1.6,3.2) E8(-0.8,3.2) E9(0,3.2) E10(0.8,3.2) E11(1.6,3.2) E12(2.4,3.2) E13(3.2,3.2) E14(4,3.2) E15(4.8,3.2) E16(5.6,3.2) E17(6.4,3.2) F1(-6.4,2.4) F2(-5.6,2.4) F3(-4.8,2.4) F4(-4,2.4) F5(-3.2,2.4) F13(3.2,2.4) F14(4,2.4) F15(4.8,2.4) F16(5.6,2.4) F17(6.4,2.4) G1(-6.4,1.6) G2(-5.6,1.6) G3(-4.8,1.6) G4(-4,1.6) G5(-3.2,1.6) G7(-1.6,1.6) G8(-0.8,1.6) G9(0,1.6) G10(0.8,1.6) G11(1.6,1.6) G13(3.2,1.6) G14(4,1.6) G15(4.8,1.6) G16(5.6,1.6) G17(6.4,1.6) H1(-6.4,0.8) H2(-5.6,0.8) H3(-4.8,0.8) H4(-4,0.8) H5(-3.2,0.8) H7(-1.6,0.8) H8(-0.8,0.8) H9(0,0.8) H10(0.8,0.8) H11(1.6,0.8) H13(3.2,0.8) H14(4,0.8) H15(4.8,0.8) H16(5.6,0.8) H17(6.4,0.8) J1(-6.4,0) J2(-5.6,0) J3(-4.8,0) J4(-4,0) J5(-3.2,0) J7(-1.6,0) J8(-0.8,0) J9(0,0) J10(0.8,0) J11(1.6,0) J13(3.2,0) J14(4,0) J15(4.8,0) J16(5.6,0) J17(6.4,0) K1(-6.4,-0.8) K2(-5.6,-0.8) K3(-4.8,-0.8) K4(-4,-0.8) K5(-3.2,-0.8) K7(-1.6,-0.8) K8(-0.8,-0.8) K9(0,-0.8) K10(0.8,-0.8) K11(1.6,-0.8) K13(3.2,-0.8) K14(4,-0.8) K15(4.8,-0.8) K16(5.6,-0.8) K17(6.4,-0.8) L1(-6.4,-1.6) L2(-5.6,-1.6) L3(-4.8,-1.6) L4(-4,-1.6) L5(-3.2,-1.6) L7(-1.6,-1.6) L8(-0.8,-1.6) L9(0,-1.6) L10(0.8,-1.6) L11(1.6,-1.6) L13(3.2,-1.6) L14(4,-1.6) L15(4.8,-1.6) L16(5.6,-1.6) L17(6.4,-1.6) M1(-6.4,-2.4) M2(-5.6,-2.4) M3(-4.8,-2.4) M4(-4,-2.4) M5(-3.2,-2.4) M13(3.2,-2.4) M14(4,-2.4) M15(4.8,-2.4) M16(5.6,-2.4) M17(6.4,-2.4) N1(-6.4,-3.2) N2(-5.6,-3.2) N3(-4.8,-3.2) N4(-4,-3.2) N5(-3.2,-3.2) N6(-2.4,-3.2) N7(-1.6,-3.2) N8(-0.8,-3.2) N9(0,-3.2) N10(0.8,-3.2) N11(1.6,-3.2) N12(2.4,-3.2) N13(3.2,-3.2) N14(4,-3.2) N15(4.8,-3.2) N16(5.6,-3.2) N17(6.4,-3.2) P1(-6.4,-4) P2(-5.6,-4) P3(-4.8,-4) P4(-4,-4) P5(-3.2,-4) P6(-2.4,-4) P7(-1.6,-4) P8(-0.8,-4) P9(0,-4) P10(0.8,-4) P11(1.6,-4) P12(2.4,-4) P13(3.2,-4) P14(4,-4) P15(4.8,-4) P16(5.6,-4) P17(6.4,-4) R1(-6.4,-4.8) R2(-5.6,-4.8) R3(-4.8,-4.8) R4(-4,-4.8) R5(-3.2,-4.8) R6(-2.4,-4.8) R7(-1.6,-4.8) R8(-0.8,-4.8) R9(0,-4.8) R10(0.8,-4.8) R11(1.6,-4.8) R12(2.4,-4.8) R13(3.2,-4.8) R14(4,-4.8) R15(4.8,-4.8) R16(5.6,-4.8) R17(6.4,-4.8) T1(-6.4,-5.6) T2(-5.6,-5.6) T3(-4.8,-5.6) T4(-4,-5.6) T5(-3.2,-5.6) T6(-2.4,-5.6) T7(-1.6,-5.6) T8(-0.8,-5.6) T9(0,-5.6) T10(0.8,-5.6) T11(1.6,-5.6) T12(2.4,-5.6) T13(3.2,-5.6) T14(4,-5.6) T15(4.8,-5.6) T16(5.6,-5.6) T17(6.4,-5.6) U1(-6.4,-6.4) U2(-5.6,-6.4) U3(-4.8,-6.4) U4(-4,-6.4) U5(-3.2,-6.4) U6(-2.4,-6.4) U7(-1.6,-6.4) U8(-0.8,-6.4) U9(0,-6.4) U10(0.8,-6.4) U11(1.6,-6.4) U12(2.4,-6.4) U13(3.2,-6.4) U14(4,-6.4) U15(4.8,-6.4) U16(5.6,-6.4) U17(6.4,-6.4)
  silkscreen extent -7.2,-7.2 7.2,7.2, body extent -7,-7 7,7, height 1.46
TSOP23-8 [mm]
  rect 1.2x0.3 smd: 1(0,0) 2(0,-0.65) 3(0,-1.3) 4(0,-1.95) 5(2.6,-1.95) 6(2.6,-1.3) 7(2.6,-0.65) 8(2.6,0)
  silkscreen extent -0.2,-2.5 2.1,0.8, body extent 0.04,-2.43 2.46,0.37, height 1.09
TSOP54 [mm]
  rect 2x0.4 smd: 1(0,0) 2(0,-0.8) 3(0,-1.6) 4(0,-2.4) 5(0,-3.2) 6(0,-4) 7(0,-4.8) 8(0,-5.6) 9(0,-6.4) 10(0,-7.2) 11(0,-8) 12(0,-8.8) 13(0,-9.6) 14(0,-10.4) 15(0,-11.2) 16(0,-12) 17(0,-12.8) 18(0,-13.6) 19(0,-14.4) 20(0,-15.2) 21(0,-16) 22(0,-16.8) 23(0,-17.6) 24(0,-18.4) 25(0,-19.2) 26(0,-20) 27(0,-20.8) 28(12,-20.8) 29(12,-20) 30(12,-19.2) 31(12,-18.4) 32(12,-17.6) 33(12,-16.8) 34(12,-16) 35(12,-15.2) 36(12,-14.4) 37(12,-13.6) 38(12,-12.8) 39(12,-12) 40(12,-11.2) 41(12,-10.4) 42(12,-9.6) 43(12,-8.8) 44(12,-8) 45(12,-7.2) 46(12,-6.4) 47(12,-5.6) 48(12,-4.8) 49(12,-4) 50(12,-3.2) 51(12,-2.4) 52(12,-1.6) 53(12,-0.8) 54(12,0)
  silkscreen extent 1.83,-21.2 10.16,0.4, body extent 0.23,-21.53 11.99,0.69, height 1.3
USB_C [mm] "USB Type-C-16Pin_A"
  oval 1x1.6 hole 0.6 slot 1.2 at 90 deg: 0(-4.32,0) 0(4.32,0)
  oval 1x2.1 hole 0.6 slot 1.7 at 90 deg: 0(-4.32,4.18) 0(4.32,4.18)
  round 0.65 hole 0.65: 0(-2.89,3.65) 0(2.89,3.65)
  rect 0.3x1.45 smd: A1(-3.375,5.092) A4(-2.6,5.092) A5(-1.25,5.092) A6(-0.25,5.092) A7(0.25,5.092) A8(-1.75,5.092) A9(2.6,5.1) A12(3.375,5.1) B1(3.075,5.1) B4(2.3,5.1) B5(1.75,5.092) B6(0.75,5.092) B7(-0.75,5.092) B8(1.25,5.092) B9(-2.3,5.092) B12(-3.075,5.092)
  silkscreen extent -4.57,-2.79 4.57,3.05, body extent -4.47,-2.6 4.47,5.3, height 3.25
XT-3225-4P [mil] "XTAL-SMT-3.2*2.5mm"
  rect 47x55 smd paste-2 mask+2: 1(0,0) 2(0,-86.61) 3(62.99,-86.61) 4(62.99,0)
  silkscreen extent -32,-122 97,35, body extent -18,-106 80,20, height 24

## Part data
C1 C2 C4 C5 C6 C7 C8 C9 C10 C11 C12 C13 C14 C15 C16 C17 C18 C19 C20 C21 C22 C23 C24 C25 C26 C27 C28 C29 C30 C31 C32 C33 C34 C35 C36 C37 C38 C39 C40 C41 C42 C43 C44 C45 C46 C48 C49 C50 C52 C53 C54 C55 C56 C57 C58 C59 C60 C61 C68 C69 C70 C71 C72 C73 C74 C75 C77 C78 C79: library part Cap, "Capacitor", LatestRevisionDate=17-Jul-2002, LatestRevisionNote="Re-released for DXP Platform.", PackageDescription="Radial Cap, Thru-Hole; 2 Leads; 0.3 in Pin Spacing", PackageReference=RAD-0.3, Published=8-Jun-2000, Publisher="Altium Limited"
CN1: library part FPC-40, "FPC-40P-0.5mm"
CON1 CON2: library part "USB type C"
D2 D3 D4: "Typical RED, GREEN, YELLOW, AMBER GaAs LED", LatestRevisionDate=17-Jul-2002, LatestRevisionNote="Re-released for DXP Platform.", PackageDescription="SM LED; 2 Flat Leads", PackageReference=3.2X1.6X1.1, PackageVersion=Feb-2002, Published=8-Jun-2000, Publisher="Altium Limited"
F1 F2: library part "Fuse Thermal", "Thermal Fuse", LatestRevisionDate=17-Jul-2002, LatestRevisionNote="Re-released for DXP Platform.", PackageDescription="Thru-Hole; 2 Leads", PackageReference=PIN-W2/E2.8, Published=24-Mar-1999, Publisher="Altium Limited"
FB1: "Magnetic-Core Inductor", LatestRevisionDate=17-Jul-2002, LatestRevisionNote="Re-released for DXP Platform.", PackageDescription="Axial Device, Thru-Hole; 2 Leads; 0.9 in Pin Spacing", PackageReference=AXIAL-0.9, Published=24-Mar-1999, Publisher="Altium Limited"
K1 K2: library part SW_PB, "Switch", LatestRevisionDate=17-Jul-2002, LatestRevisionNote="Re-released for DXP Platform.", PackageDescription="Switch; 2 Leads", PackageReference=SPST-2, Published=24-Mar-1999, Publisher="Altium Limited"
L1 L2: library part Inductor, "Inductor", Code_IEC=1005, Code_JEITA=0402, LatestRevisionDate=29-May-2009, LatestRevisionNote="IPC-7351 Footprint Added.", PackageDescription="Chip Inductor", PackageReference=0402-A, Published=8-Jun-2000, Publisher="Altium Limited"
P1 P2: "Header, 20-Pin, Dual row", LatestRevisionDate=17-Jul-2002, LatestRevisionNote="Re-released for DXP Platform.", Publisher="Altium Limited"
P3: "Header, 4-Pin, Dual row", LatestRevisionDate=17-Jul-2002, LatestRevisionNote="Re-released for DXP Platform.", Publisher="Altium Limited"
P4 P5: "Header, 2-Pin, Dual row", LatestRevisionDate=17-Jul-2002, LatestRevisionNote="Re-released for DXP Platform.", Publisher="Altium Limited"
Q1: library part NPN, "NPN Bipolar Transistor", Code_JEDEC=TO-226-AA, LatestRevisionDate=17-Jul-2002, LatestRevisionNote="Re-released for DXP Platform.", PackageDescription="TO, Flat Index; 3 In-Line, Axial Leads; Body Dia. 4.8mm; Leads 0.55 x 0.51 mm (max)", PackageReference=TO-226-AA, Published=8-Jun-2000, Publisher="Altium Limited"
R1 R2 R3 R4 R5 R6 R7 R8 R9 R10 R11 R12 R13 R14 R15 R16 R17 R18 R19 R20 R21 R22 R23 R24 R25 R26 R27 R28 R29 R30 R31 R32 R33 R34 R35 R36 R37 R38 R39 R40 R41 R42 R43 R44 R48 R49 R51 R57 R60 R61 R62 R63 R64 R67 R68 R69 R70 R71 R72 R73 R74 R75 R76 R77 R78 R79 R80 R81 R82 R83 R84 R85: library part Res, "Resister"
RF1: library part PCB-ANT-2.4G-S
T3 T8 T9 T10 T11 T14 T17: library part TEST-POINT, "测试点"
U2 U3: library part W25Q128, "W25Q128"
U5: "32MB SDRAM"
X1 X2 X3 X4: library part XTAL_3225, "Crystal Oscillator", LatestRevisionDate=17-Jul-2002, LatestRevisionNote="Re-released for DXP Platform.", PackageDescription="Crystal, Thru-Hole; 2 Leads; Body 3.1 x 8.2 mm (Dia.xH)", PackageReference=R38, Published=8-Jun-2000, Publisher="Altium Limited"
Pad1 Pad2 Pad3 Pad4: LatestRevisionDate=17-Jul-2002, LatestRevisionNote="Re-released for DXP Platform.", Publisher="Altium Limited"

## Via types
v1: diameter 17.72, hole 9.84, Top Layer to Bottom Layer, tented both sides, 107 vias

## Nets (pads, with @x,y where several pads share a name; then routed paths per layer and width w, separated by ;. In a path a pad name is that pad's centre, name@x,y a point inside that pad or via, vN(x,y) a via of type N, cw(c..) or ccw(c..) an arc to the next point about the centre after c; other vN are vias at no path point)
+3V3: "TF Card.4" C1.2 C2.2 C4.2 C5.2 C6.2 C10.2 C11.2 C13.2 C14.2 C15.2 C16.2 C17.2 C18.2 C19.2 C20.2 C21.2 C22.2 C23.2 C24.2 C25.2 C26.2 C27.2 C28.2 C29.2 C30.2 C31.2 C32.2 C33.2 C34.2 C49.2 C54.2 C55.2 C56.2 C57.2 C58.2 C59.2 C60.2 C70.1 C77.2 C78.2 C79.2 D1.2 D2.1 D2.4 D3.1 FB1.1 L1.2 P1.1 P1.17 P2.1 P2.17 Q1.1 R1.1 R2.1 R6.2 R8.1 R18.1 R20.1 R23.2 R25.1 R26.1 R27.2 R29.1 R30.1 R31.2 R32.1 R34.2 R35.2 R36.2 R37.1 R49.2 R51.1 R60.1 R61.1 R62.1 R64.1 R67.1 R68.1 R69.1 R70.1 R71.1 R72.1 R73.1 R81.1 R82.1 R83.1 R84.1 R85.1 U1.A6 U1.C17 U1.E6 U1.E9 U1.E11 U1.F5 U1.F17 U1.G5 U1.G13 U1.G17 U1.H5 U1.H13 U1.J13 U1.K5 U1.K13 U1.L5 U1.L13 U1.M5 U1.M13 U1.N7 U1.N8 U1.N10 U1.N11 U1.N12 U1.P17 U1.U12 U2.3 U2.7 U2.8 U3.8 U4.5 U5.1 U5.3 U5.9 U5.14 U5.27 U5.43 U5.49 U7.1 U7.9 U7.24 U7.36 U7.48 U8.22 X2.1 X2.2 | length 1819.5
  Top Layer w12: C6.2@408,1353 408,1345.74 447.37,1306.37 R84.1@447.37,1306 ; U7.24@2520.27,590.36 2520.27,525.1 C77.2@2530.37,515 ; R62.1@2573.37,1674 R62.1@2573.37,1675.37 ; R61.1@2619.37,1628 R61.1@2624,1628
  Top Layer w16: R83.1@353.37,1257 R82.1@353.37,1307 C5.2@353.37,1354 407,1354 C6.2@408,1353 ; C17.2@447.37,995 C16.2@447.37,1042 C15.2@447.37,1089 R51.1@447.37,1136 R85.1@447.37,1259 R84.1@447.37,1306 ; U2.3@505.65,329 559,329 578,348 578,473 R1.1@549,502 ; C21.2@1654,908.37 C22.2@1701,908.37 C24.2@1796,908.37 ; FB1.1@2050,551 2064.63,551 R27.2@2109.63,596 2109,596.63 C1.2@2109,645 2051,645 R35.2@2050,646 ; X2.1@2079,891 X2.2@2079,963.83 2083.54,968.37 C49.2@2137,968.37 ; C20.2@2404.37,283 2404,283.37 C10.2@2404,377 2404,432.69 C11.2@2406.31,435 ; R29.1@2530.63,1506 R30.1@2530.63,1553
  Top Layer w20: D2.1@613.52,605.69 D2.4@646.99,605.69 ; C18.2@776,791.37 C14.2@823,791.37 ; U2.7@797,379 U2.8@797,429 805.37,437.37 C2.2@805.37,501 805.37,567.79 D1.2@824.4,586.82
+3V_BAT: D1.1 P2.2
+5V_USB: C7.2 C8.2 C9.2 C43.2 C44.2 CN1.1 CN1.2 F1.2 F2.2 P1.2 P1.4 R5.2 R40.1 U4.2 U9.2 U10.2 | length 468.2
  Top Layer w12: U4.2@2785.41,391.36 2785.41,429.01 v1(2802.2,445.8)
  Top Layer w16: C44.2@304,327 C43.2@304,380
  Top Layer w20: U10.2@2835,1127.5 v1(2869.3,1127.5) ; R40.1@2836,925 v1(2836,945.4) ; U9.2@2838,550.5 v1(2872.3,550.5) ; v1(2849,386.6) 2872.77,386.6 R5.2@2873,386.37 ; F2.2@2858.55,717 2858.55,733.95 v1(2876,751.4) C9.2@2876,799 2932.69,799 C7.2@2933,798.69
  Top Layer w30: C8.2@2781.31,1254 v1(2820.31,1293) F1.2@2859.55,1293
  other v1: 2804,1275.6
BT_HOST_WAKE: R62.2 U1.L2 U8.7
BT_RST_N: R61.2 U1.F4 U8.34
BT_UART_CTS_N: P4.1 R64.2 U1.R15 U8.44
BT_UART_RTS_N: P4.3 R63.2 U1.R16 U8.41
BT_UART_RXD: P4.4 U1.P12 U8.43
BT_UART_TXD: P4.2 U1.P11 U8.42
BT_WAKE: R60.2 U1.F3 U8.6
ETH_CRS_DV: P2.21 U1.R5
ETH_MDC: P2.12 U1.M2
ETH_MDIO: P2.24 U1.N3
ETH_REF_CLK: P2.22 U1.N4
ETH_RESET: P2.26 R37.2 U1.U2
ETH_RXD0: P2.18 U1.T4
ETH_RXD1: P2.19 U1.U4
ETH_TX_EN: P2.3 U1.B9
ETH_TXD0: P2.5 U1.D9
ETH_TXD1: P2.8 U1.D8
F103_BOOT0: R38.1 T14.1 U7.44 | length 93.1
  Top Layer w8: R38.1@2371,974 2382.47,962.53 U7.44@2382.47,885.64
F103_DBG_RXD: P3.4 U7.43 | length 347.4
  Top Layer w8: U7.43@2402.16,885.64 2402.16,913.46 2425.5,936.8 2555.8,936.8 2638.4,854.2 v1(2677.9,854.2)
F103_DBG_TXD: P3.2 U7.42 | length 343.5
  Top Layer w8: U7.42@2421.84,885.64 2421.84,849.86 2427,844.7 2517.5,844.7 2536.2,863.4 2586.9,863.4 v1(2680.8,769.5)
F103_NRST: C74.2 P3.5 R35.1 U7.7 | length 486.2
  Top Layer w8: R35.1@2010.63,646 2053.53,688.9 2189.9,688.9 2229.16,728.16 U7.7@2264.36,728.16 2286.14,728.16 v1(2377.8,636.5)
  Top Layer w16: C74.2@2010.63,599 R35.1@2010.63,646
F103_SWCLK: P3.3 U7.37 | length 183.9
  Top Layer w8: U7.37@2520.27,885.64 2586.16,885.64 2658.2,813.6 v1(2674.3,813.6)
F103_SWDIO: P3.1 U7.34 | length 152.8
  Top Layer w8: U7.34@2559.64,806.9 2605.4,806.9 v1(2681.1,731.2)
F103_USB_N: R15.2 U7.32 | length 347.2
  Top Layer w8: U7.32@2559.64,767.53 2590.52,767.53 2667.9,690.14 2667.9,584.73 R15.2@2739.63,513
F103_USB_P: R14.2 U7.33 | length 335.4
  Top Layer w8: U7.33@2559.64,787.21 2596.29,787.21 2684.3,699.2 2684.3,593.79 2717.09,561 R14.2@2739.63,561
F103_USER_KEY: P3.6 U7.22 | length 70.6
  Top Layer w12: U7.22@2480.9,590.36 2480.7,590.56 2481.4,591.26 v1(2481.4,660.6)
FDCAN1_RX: P2.10 U1.D5
FDCAN1_TX: P2.7 U1.D4
FDCAN2_RX: P1.36 U1.T14
FDCAN2_TX: P1.33 U1.U14
FLASH_SPI_MISO: U1.A10 U2.2
FLASH_SPI_MOSI: U1.A5 U2.5
FLASH_SPI_NCS: R1.2 U1.U3 U2.1 | length 74.6
  Top Layer w16: U2.1@505.65,429 509.63,432.98 R1.2@509.63,502
FLASH_SPI_SCK: R3.2 U1.T3
FMC_A0: U1.G4 U5.23 | length 969.5
  Top Layer w5: U1.G4@1010.02,1015.51 v1(1025.7,1031.2) ; v1(1426.4,1013.6) 1956.97,1013.6 1957.67,1012.9 1974.77,1030 2072.76,1030 2114.06,1071.3 2214.6,1071.3 2275.95,1132.65 U5.23@2275.95,1177
  GND w5: v1@1423.94,1016.06 v1(1426.4,1013.6)
FMC_A1: U1.G3 U5.24 | length 1420
  Top Layer w5: U1.G3@1010.02,984.02 1025,999 v1(1025,999.3) ; v1(1375,998.2) 1953.9,998.2 1954.8,997.3 1978.5,1021 2076.48,1021 2116.78,1061.3 2237.7,1061.3 2307.45,1131.05 U5.24@2307.45,1177
  VCC w5: v1(1025,999.3) 1041.76,1016.06 1357.14,1016.06 v1(1375,998.2)
FMC_A2: U1.G1 U5.25 | length 1460.7
  Top Layer w5: U1.G1@1010.02,921.02 v1(1025.19,936.2) ; v1(1427.3,982.8) 1953.5,982.8 1981.3,1010.6 2080.4,1010.6 2121.3,1051.5 2255.1,1051.5 2338.95,1135.35 U5.25@2338.95,1177
  VCC w5: v1(1025.19,936.2) 1073.45,984.46 1157.56,984.46 1159.22,982.8 v1(1427.3,982.8)
FMC_A3: U1.H4 U5.26 | length 1090.5
  Top Layer w5: U1.H4@1041.51,1015.51 v1(1056.32,1000.7) ; v1(1405.6,967.4) 1952.4,967.4 1986.6,1001.6 2086.4,1001.6 2127.3,1042.5 2266.4,1042.5 2370.44,1146.54 U5.26@2370.44,1177
FMC_A4: U1.J5 U5.29 | length 1293.3
  Top Layer w5: 1504.57,1090 1557.5,1142.93 1557.5,1402.67 1589.53,1434.7 2230,1434.7 2370.44,1575.14 U5.29@2370.44,1649.44
FMC_A5: U1.J4 U5.30 | length 1252.3
  Top Layer w5: 1506.64,1104.8 1548.5,1146.66 1548.5,1406.4 1587.7,1445.6 2207.3,1445.6 2338.95,1577.25 U5.30@2338.95,1649.44